# Altium PCB PCB1.PcbDoc
Units mm, origin at the board's own origin, x right, y up, seen from the top; angles counter-clockwise.
Board outline 36.92 x 50 mm, 2 copper layers (Top Layer, Bottom Layer); 21 components, 13 nets, 49 pads, 19 vias.
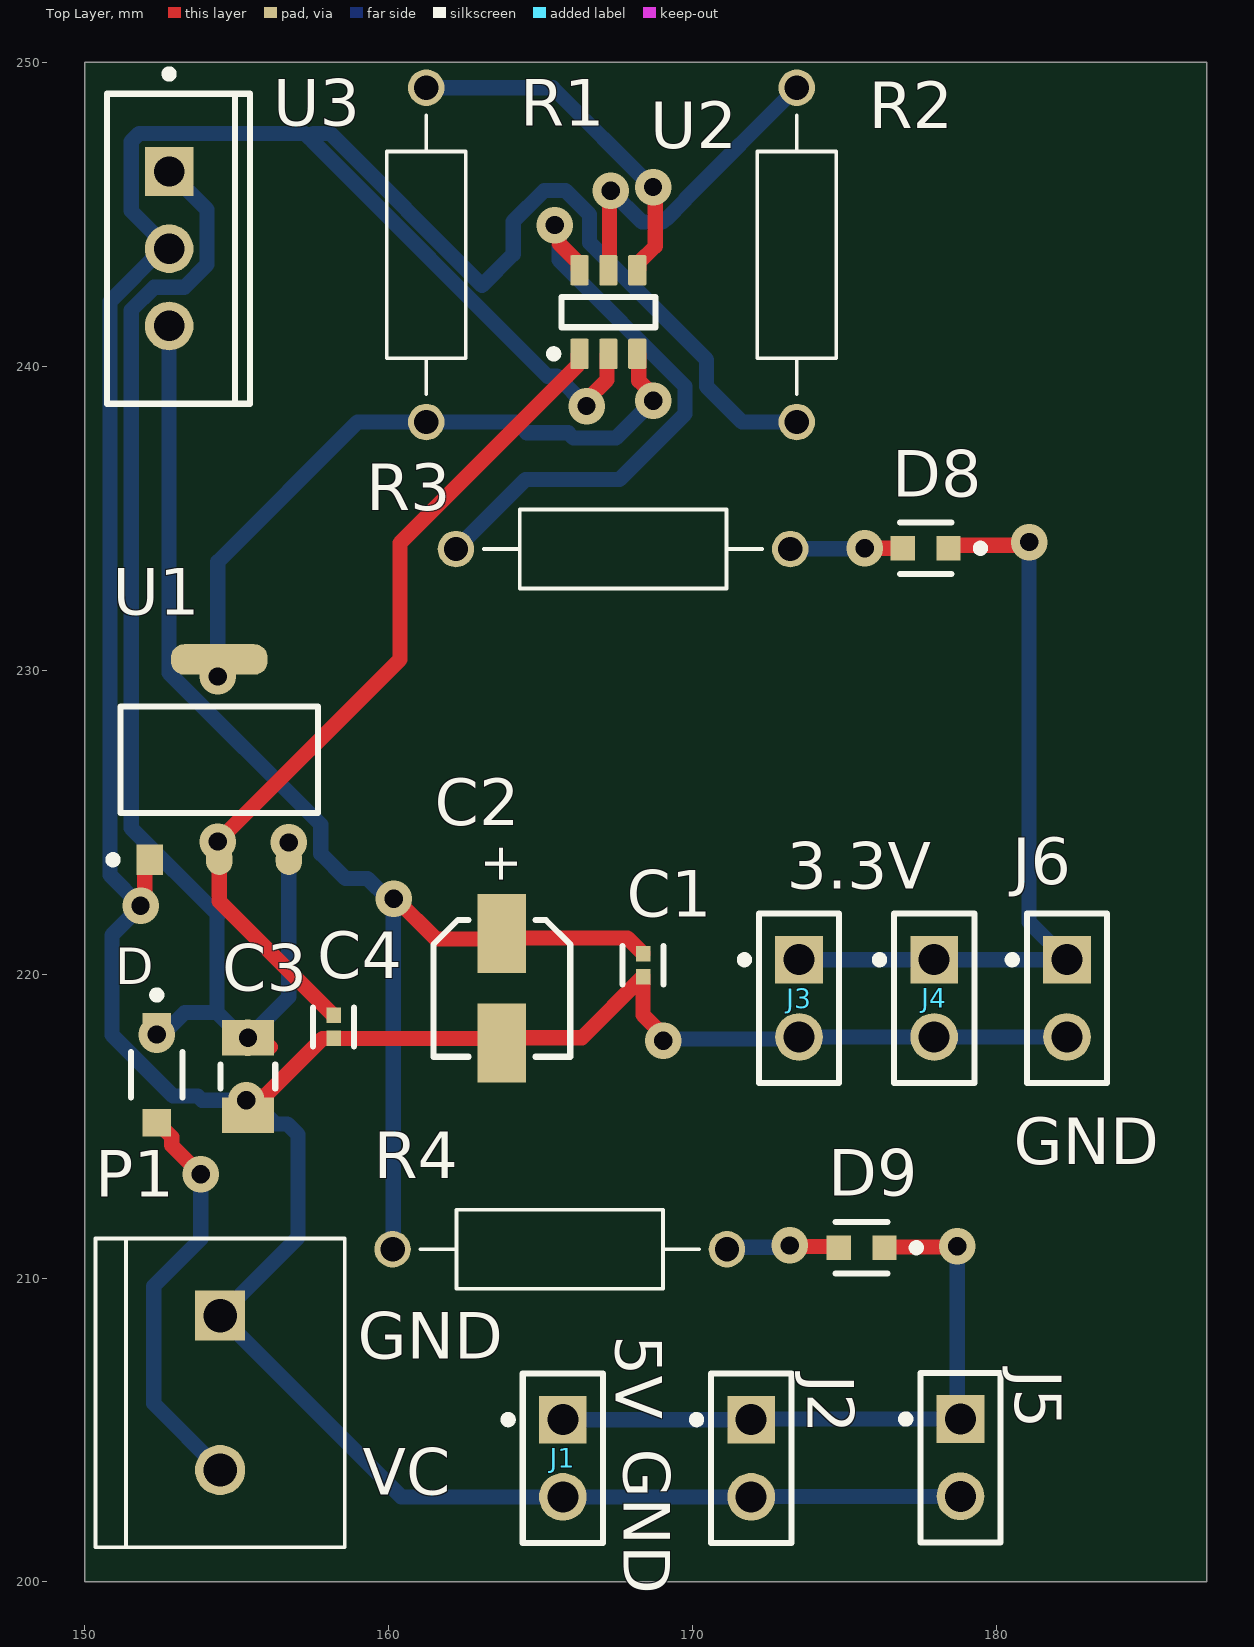
[diagram p0: Top Layer view]
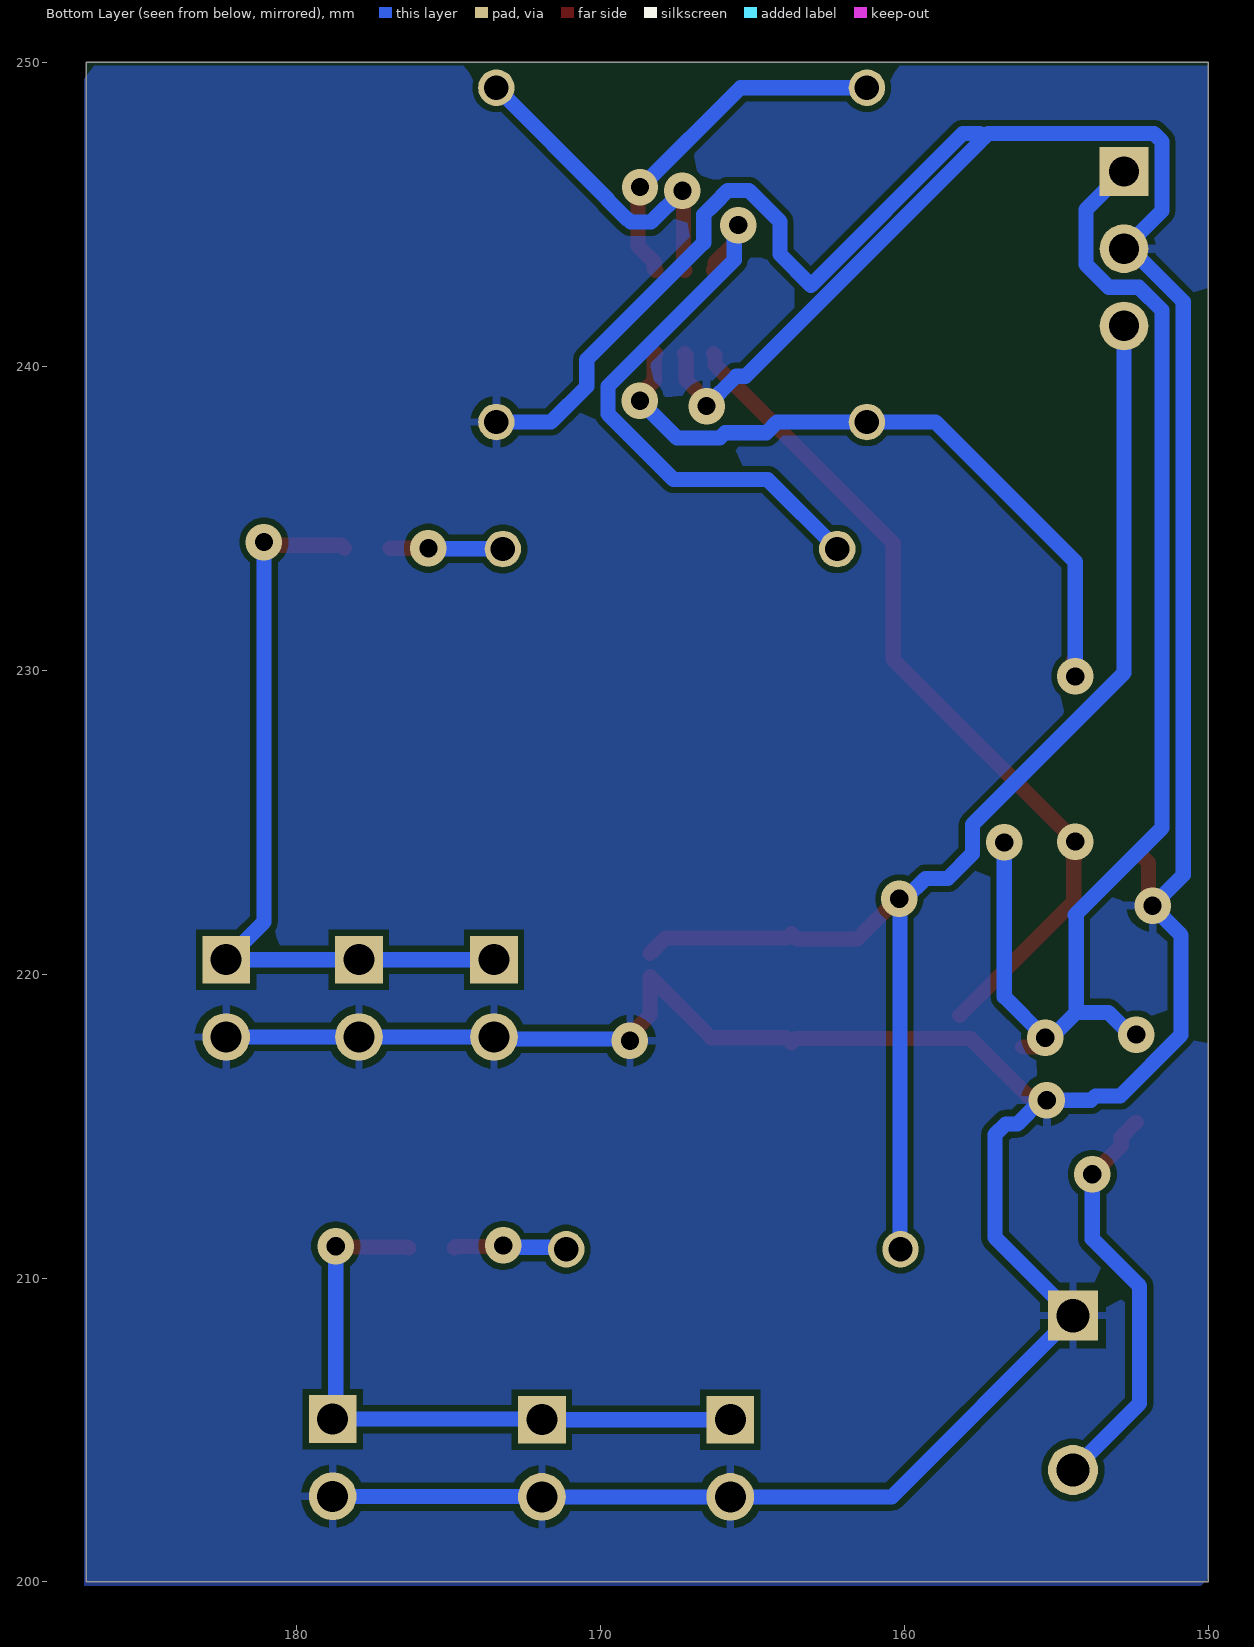
[diagram p1: Bottom Layer view, seen from below]
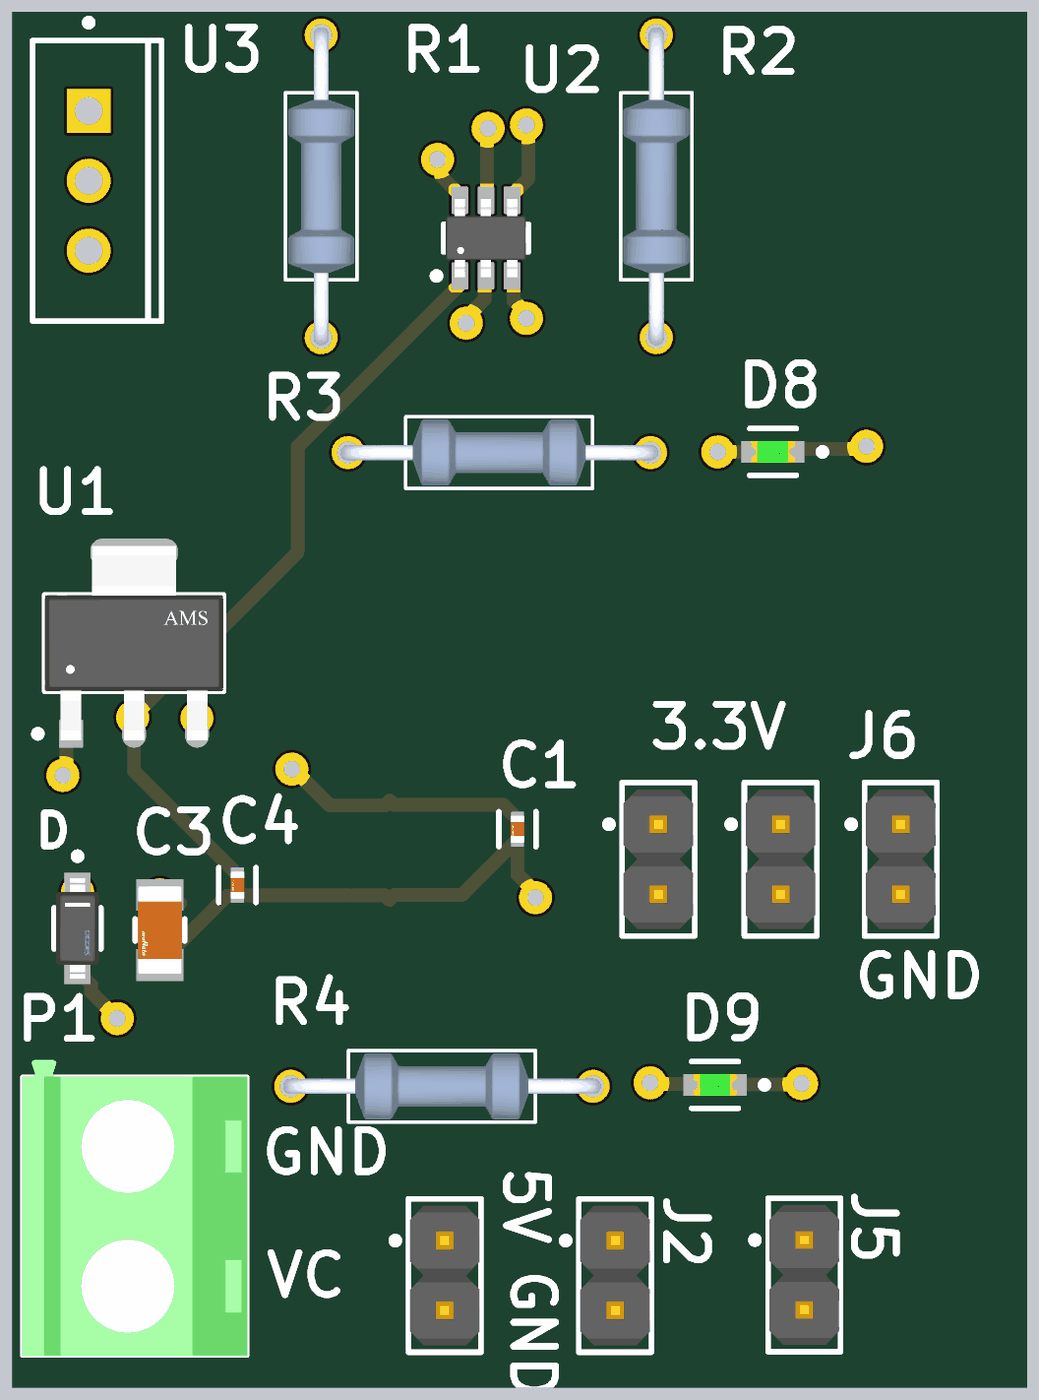
[diagram p2: 3D render of the assembled board from above, using the file's embedded part models]

## Layer stack, top to bottom
Top Solder: solder mask 0.0102, Solder Resist, Dk 3.5
Top Layer: signal copper 0.0356
Dielectric 1: dielectric 0.32, FR-4, Dk 4.8
Bottom Layer: signal copper 0.0356
Bottom Solder: solder mask 0.0102, Solder Resist, Dk 3.5

## Board outline
150,200 150,250 186.924,250 186.924,200

## Design rules (kind name [scope] priority, off if disabled: settings)
Clearance Clearance_1 [All] p1: gap=0.2 ignorepadtopadclearanceinfootprint=FALSE
MinimumSolderMaskSliver [All] p1: minsoldermaskwidth=0.146
PolygonConnect [All] p1: connectstyle=Relief reliefconductorwidth=0.254 reliefentries=4 polygonreliefangle="90 Angle" airgapwidth=0.254
RoutingVias [All] p1: holewidth=0.6 width=1.2 viastyle="Through Hole" minholewidth=0.6 minwidth=1.2 maxholewidth=0.6 maxwidth=1.2
SilkToSolderMaskClearance [All] p1: minsilkscreentomaskgap=0.2 clearancetoexposedcopper=TRUE
SolderMaskExpansion [All] p1: expansion=0.102 istentingtop=FALSE
SupplyNets "Schematic Supply Nets_1" [InNet('+12')] p1: voltage=0.000
SupplyNets "Schematic Supply Nets" [InNet('GND')] p2: voltage=0.000
Width "3.3V width" [All] p1: maxlimit=0.5 minlimit=0.5 preferedwidth=0.5
Width 5V_width [All] p2: maxlimit=0.5 minlimit=0.5 preferedwidth=0.5
Width 12V_width [All] p3: maxlimit=0.5 minlimit=0.5 preferedwidth=0.5
Width [All] p4: maxlimit=0.254 minlimit=0.254 preferedwidth=0.254
28 further rules are at their usual default settings.

## Components (designator, comment, footprint, x,y, rotation, side; value= is the part's Value field where it differs from the comment)
C1 "0.1 uf" FP-CL17-IPC_C 168.377,220.294 r270 top
C2 "22 uf" WCAP-ASLL_D4H5.5 -1106.272,1489.529 r90 top
C3 "0.33 uf" FP-GRM31C-0_2-e0_3_0_8-IPC_C 155.372,216.631 r270 top
C4 "0.1 uf" FP-CL17-IPC_C 158.191,218.262 r270 top
D "B0520LW-7-F" FP-SOD123-MFG 152.375,216.687 r270 top value=170pF (schematic designator D1)
D8 "LTST-C190GKT" FP-LTST-C190GKT-MFG 177.673,234.01 r180 top
D9 "LTST-C190GKT" FP-LTST-C190GKT-MFG 175.565,210.998 r180 top
J1 "M20-9990245" FP-M20-9990245-MFG 165.735,204.069 r270 top
J2 "M20-9990245" FP-M20-9990245-MFG 171.933,204.069 r270 top
J3 "M20-9990245" FP-M20-9990245-MFG 173.507,219.202 r270 top
J4 "M20-9990245" FP-M20-9990245-MFG 177.952,219.202 r270 top
J5 "M20-9990245" FP-M20-9990245-MFG 178.816,204.089 r270 top
J6 "M20-9990245" FP-M20-9990245-MFG 182.321,219.202 r270 top
P1 "282837-2" TE_282837-2 154.457,206.223 r270 top
R1 "MFR-25FBF52-10K" RESAD1100W55L680D260 161.239,243.664 r90 top
R2 "MFR-25FBF52-1.4KOhm" RESAD1100W55L680D260 173.431,243.664 r270 top
R3 "MFR-25FBF52-10K" RESAD1100W55L680D260 167.716,233.985 r0 top
R4 "MFR-25FBF52-10K" RESAD1100W55L680D260 165.633,210.947 r0 top
U1 "AMS1117-3.3" FP-AMS1117-IPC_C 154.432,227.058 r90 top
U2 "TPS2553DBVR-1" DBV0006A_N 167.234,241.783 r90 top
U3 "LM7805CT" FAIR-TO-220-3 152.781,243.865 r0 top

## Footprints (in the part's own frame and the unit in brackets; to place one, negate y for a bottom-side part, rotate by r counter-clockwise, add the part's x,y. Pads: shape width x height; smd on the part's side, far side on the other; paste and mask are expansions set on the pad)
DBV0006A_N [mm] "SOT23, 6-Leads, Body 3.05x1.75mm, Pitch 0.95mm, IPC Medium Density"
  rrect17% 1x0.6 smd: 1(-1.375,0.95) 2(-1.375,0) 3(-1.375,-0.95) 4(1.375,-0.95) 5(1.375,0) 6(1.375,0.95)
  silkscreen extent -1.5,-1.55 0.5,1.92, body extent -1.42,-1.46 1.42,1.46, height 1.11
FAIR-TO-220-3 [mm] "FM, 3-Leads, Body 10.2x4.7mm, Pitch 2.54mm"
  rect 1.6x1.6 hole 1: 1(0,2.54)
  round 1.6 hole 1: 2(0,0) 3(0,-2.54)
  silkscreen extent -2.04,-5.1 2.66,5.87, body extent -2.04,-5.1 2.66,5.1, height 18.95
FP-AMS1117-IPC_C [mm]
  rect 1.004x0.872 smd paste+0 mask+0: 1(-3.295,2.29)
  rrect100% 1.004x0.872 smd paste+0 mask+0: 2(-3.295,0) 3(-3.295,-2.29)
  rrect87% 1.004x3.182 smd paste+0 mask+0: 4(3.295,0)
  silkscreen extent -3.42,-3.25 1.75,3.62, body extent -3.53,-3.25 3.53,3.25, height 1.8
FP-CL17-IPC_C [mm]
  rect 0.515x0.472 smd paste+0 mask+0: 1(-0.379,0) 2(0.379,0)
  silkscreen extent -0.64,-0.67 0.64,0.67, body extent -0.74,-0.38 0.74,0.38, height 0.25
FP-GRM31C-0_2-e0_3_0_8-IPC_C [mm]
  rect 1.155x1.706 smd paste+0 mask+0: 1(-1.276,0) 2(1.276,0)
  silkscreen extent -0.4,-0.9 0.4,0.9, body extent -1.95,-1 1.95,1, height 0.25
FP-LTST-C190GKT-MFG [mm]
  rect 0.8x0.8 smd paste+0 mask+0: 1(-0.75,0) 2(0.75,0)
  silkscreen extent -1.92,-0.85 0.85,0.85, body extent -1.25,-0.55 1.25,0.55, height 0.25
FP-M20-9990245-MFG [mm]
  rect 1.57x1.57 hole 1.02 paste-2539.97 mask+0: 1(-1.27,0)
  round 1.57 hole 1.02 paste-2539.97 mask+0: 2(1.27,0)
  silkscreen extent -2.79,-1.92 2.79,1.32, body extent -2.89,-1.42 2.89,1.42, height 0.25
FP-SOD123-MFG [mm]
  rect 0.9x0.95 smd paste+0 mask+0: 1(-1.575,0) 2(1.575,0)
  silkscreen extent -2.75,-0.85 0.75,0.85, body extent -2.12,-0.95 2.12,0.95, height 0.25
RESAD1100W55L680D260 [mm]
  round 1.2 hole 0.8: 1(-5.5,0) 2(5.5,0)
  silkscreen extent -4.58,-1.3 4.58,1.3, body extent -5.77,-1.2 5.77,1.2, height 2.4
TE_282837-2 [mm]
  rect 1.65x1.65 / inner round 1.65 / far side rect 1.65x1.65 hole 1.1: 1(-2.54,0)
  round 1.65 hole 1.1: 2(2.54,0)
  silkscreen extent -5.08,-4.1 5.08,4.1, body extent -5.68,-4.1 5.08,4.1, height 10
WCAP-ASLL_D4H5.5 [mm] "Aluminium Electrolytic V-Chip SMT Capacitors, 4x5.5mm"
  rect 2.6x1.6 smd: 1(-1268.2,-1270) 2(-1271.8,-1270)
  silkscreen extent -1272.25,-1272.25 -1267.75,-1267.75, body extent -1272.5,-1272.15 -1267.5,-1267.85, height 5.5

## Part data
C1 C4: library part CMP-13271-001069-1, "Cap Ceramic 100nF 10V X7R ±10% SMD 0402 +125°C Paper T/R", Capacitance=100nF, Case Code (Imperial)=0402, Case Code (Metric)=1005, Dielectric=X7R, Max Operating Temperature=125°C, Min Operating Temperature=-55°C, Package Quantity=1, Tolerance=10%, Voltage Rating=10V, Case/Package=0402, Contact Plating=Tin, Depth=0.5mm, Height=0.5mm, Length=1mm, Mount="Surface Mount", Packaging="Tape and Reel", Radiation Hardening=No, Thickness=0.022inch, Width=0.02inch
C2: library part CMP-03913-53914501-2, "865060240001 WCAP-ASLL Aluminum Electrolytic Capacitors", Capacitance=22µF, Case/Package=Radial, ESR (Equivalent Series Resistance)=1.70696Ω, Insulation Resistance=3.33333MΩ, Leakage Current=3µA, Max Operating Temperature=105°C, Min Operating Temperature=-55°C, Ripple Current=90mA, Tolerance=20%, Voltage Rating=10V, Diameter=4mm, Height=5.5mm, Height - Seated (Max)=5.5118mm, Impedance=1.35Ω, Length=5.5mm, Life (Hours)=2000hours, Mount="Surface Mount", NexarPartId=53914501, Polarity=Polar, REACH SVHC=Unknown, Ripple Current (AC)=90mA, RoHS=Compliant, Voltage Rating (DC)=10V
C3: library part CMP-06035-063427-1, "CAP CER 0.33UF 25V C0G/NP0 1206", RoHS Compliant=Yes
D: library part CMP-12790-000026-1, "DIODE SCHOTTKY 20V 500MA SOD123", Capacitance=170pF, Forward Current=0.5A, Manufacturer="Diodes Inc.", Max Junction Temp=+125°C, Max Repetitive Reverse Voltage=20V, Max Surge Forward Current=5.5A, Package=SOD123, Peak Reverse Current=250uA, Temperature="-65°C to +125°C", Temperature Range Low=-65°C, Automotive=No, Category=Diode, ComponentLink2Description=Datasheet, ComponentLink2URL=https://www.diodes.com/assets/Datasheets/ds30051.pdf, Device Class L1="Discrete Semiconductors", Device Class L2=Diodes, Device Class L3="Schottky Diodes", Digikey Description="DIODE SCHOTTKY 20V 500MA SOD123", Footprint Url=https://www.diodes.com/assets/Package-Files/SOD123.pdf, Height=1.45mm, Ipc Land Pattern Name=SOD365155X123-2, Lead Free=Yes, Manufacturer Part Number=B0520LW-7-F, Mouser Description="Schottky Diodes & Rectifiers 20V 410mW", Octopart=https://octopart.com/b0520lw-7-f-diodes+inc.-325707, Reverse Voltage=20V, RoHS=TRUE, Standoff Height=0mm, Temperature Range High=+125°C
D8 D9: library part CMP-22017-000005-2, "LED GREEN CLEAR CHIP SMD", Case Code (Imperial)=0603, Case Code (Metric)=1608, Color=Green, Forward Current=30mA, Forward Voltage=2.1V, Lens Color=Colorless, Max Operating Temperature=85°C, Min Operating Temperature=-55°C, Package Quantity=1, Power Dissipation=100mW, Reverse Voltage=5V, Test Current=10mA, Voltage=2V, Case/Package=0603, Depth=0.8mm, Dominant Wavelength=569nm, Height=0.8mm, Illumination Color=Green, Lead Free="Lead Free", Length=1.6mm, Lens Style=Clear, Lens Transparency=Clear, Luminous Intensity=6mcd, Mount="Surface Mount", Number of Elements=1, Number of LEDs=1, Number of Pins=2, Packaging="Tape and Reel", Power Rating=100mW, Radiation Hardening=No, Viewing Angle=130°, Wavelength=565nm, Width=0.8mm
J1 J2 J3 J4 J5 J6: library part CMP-15831-000105-1, "CONN HEADER VERT 2POS 2.54MM", Case/Package=SIL, Color=Black, Contact Resistance=25mR, Current=3A, Flammability Rating="UL94 V-0", Insulation Resistance=10GR, Max Operating Temperature=105°C, Min Operating Temperature=-40°C, Package Quantity=1000, Voltage=50V, Voltage Rating (AC)=750V, Connector Type="Male Pin", Contact Finish - Mating=GOLD, Contact Material=Brass, Contact Mating Length=0.24inch, Contact Plating=Gold, Contact Shape=Square, Contact Type="Male Pin", Current Rating=3A, Depth=2.54mm, Fastening Type=Pull, Gender=Male, Height=0.12inch, Housing Color=Black, Housing Material=Nylon, Insulation Color=Black, Insulation Material=Nylon, Lead Pitch=2.54mm, Length=5.08mm, Mated Stacking Heights=16.54mm, Mating Cycles=300, Max Current Rating=3A, Mount="Through Hole", Number of Contacts=2, Number of Poles=2, Number of Positions=2, Number of Rows=1, Orientation=Straight, Packaging=Bulk, Pitch=2.54mm, Radiation Hardening=No, Reach SVHC Compliant=Yes, Series=M20, Termination=Solder, Weight=0.25lb, Width=0.25inch, Working Voltage=750V
P1: "Ð Ð°Ð·ÑŠÐµÐ¼Ð½Ñ‹Ðµ ÐºÐ»ÐµÐ¼Ð¼Ð½Ñ‹Ðµ ÐºÐ¾Ð»Ð¾Ð´ÐºÐ¸ Ð Ð¾Ð·ÐµÑ‚ÐºÐ° 2 Ð¿Ð¾Ð»Ð¾Ð¶ÐµÐ½Ð¸Ñ 5,08 Ð¼Ð¼ ÐŸÑ€Ð¸Ð¿Ð¾Ð¹ Ð¿Ñ€ÑÐ¼Ð¾Ð¹ Ñ‡ÐµÑ€ÐµÐ· Ð¾Ñ‚Ð²ÐµÑ€ÑÑ‚Ð¸Ðµ 13,5 Ð / ÐºÐ¾Ð½Ñ‚Ð°ÐºÑ‚", Package=None, Availability="In Stock", Check_prices=https://www.snapeda.com/parts/282837-2/TE+Connectivity+AMP+Connectors/view-part/?ref=eda, MF="TE Connectivity", MP=282837-2, Price=None, Purchase-URL=https://pricing.snapeda.com/search/part/282837-2/?ref=eda, SnapEDA_Link=https://www.snapeda.com/parts/282837-2/TE+Connectivity+AMP+Connectors/view-part/?ref=snap
R1 R3 R4: "10.2 kOhms Â±1% 0.25W, 1/4W Through Hole Resistor Axial - Metal Film", Package="RADIAL-2 YAGEO", Check_prices=https://www.snapeda.com/parts/MFR-25FBF52-10K/Yageo/view-part/?ref=eda, MF=Yageo, MP=MFR-25FBF52-10K, SnapEDA_Link=https://www.snapeda.com/parts/MFR-25FBF52-10K/Yageo/view-part/?ref=snap
R2: library part MFR-25FBF52-10K, "10.2 kOhms Â±1% 0.25W, 1/4W Through Hole Resistor Axial - Metal Film", Package="RADIAL-2 YAGEO", Check_prices=https://www.snapeda.com/parts/MFR-25FBF52-10K/Yageo/view-part/?ref=eda, MF=Yageo, MP=MFR-25FBF52-10K, SnapEDA_Link=https://www.snapeda.com/parts/MFR-25FBF52-10K/Yageo/view-part/?ref=snap
U1: library part CMP-209535-000001-1, "LDO Voltage Regulators 1A, 3.3V", Dropout Voltage=1.1V, Manufacturer="Advanced Monolithic Systems", Max Junction Temp=+125°C, Max Power Dissipation=1.2W, Max Supply Voltage=15V, Nominal Supply Current=5mA, Output Current=1A, Output Voltage=3.3V, Package=AMS1117, Temperature="-40°C to +125°C", Temperature Range Low=-40°C, Automotive=No, Category=IC, ComponentLink2Description=Datasheet, ComponentLink2URL=http://www.advanced-monolithic.com/pdf/ds1117.pdf, Device Class L1="Integrated Circuits (ICs)", Device Class L2="Power Management ICs", Device Class L3="Voltage Regulators - Linear", Height=1.8mm, Ipc Land Pattern Name=SOT229P700X180-4, Lead Free=Yes, Manufacturer Part Number=AMS1117-3.3, Number Of Outputs=1, Octopart=https://octopart.com/ams1117-3.3-advanced+monolithic+systems-25899300, Output Type=Fixed, RoHS=TRUE, Standoff Height=0.64mm, Temperature Range High=+125°C
U2: library part CMP-0337-00282-2, "Adjustable, Active High, Latch-off, Current-Limited Power-Distribution Switch, 0.075 to 1.7 A Current Limit, -40 to 85 degC, 6-pin SOT-23 (DBV), Green (RoHS & no Sb/Br)", Continuous Current(Max)(A)=1.5, Current Limit Accuracy @ 1A="+/-7.5% (925mA min / 1075mA max)", Current Limit Topology=Latch-off, Current Limit(A)="0.075 to 1.7", Manufacturer="Texas Instruments", Rating=Catalog, Code_JEDEC=MO-178-AB*, ComponentLink1Description=Datasheet, ComponentLink1URL=http://www.ti.com/general/docs/lit/getliterature.tsp?genericPartNumber=TPS2553-1&fileType=pdf, DatasheetVersion=SLVS841E, Eco-Plan="Green (RoHS & no Sb/Br)", Enable="Active High", Mounting Technology="Surface Mount", Number of Switches=1, PackageDescription="6-Pin Plastic Small-Outline Package, 2.9 x 1.6 mm Body, 0.95 mm Pitch, 2.8 mm Lead Span", PackageReference=DBV0006A, PackageVersion="revK, Mar-2006", PartNumber=TPS2553DBVR-1, rDS(on) per FET(Typ)(mOhms)="100/DRV, 85/DBV", Vin(Max)(V)=6.5, Vin(Min)(V)=2.5
U3: library part CMP-2000-04938-1, "Positive Voltage Regulator, 5 V, 1 A, -40 to 125 degC, 3-Pin TO-220, RoHS, Tube", Manufacturer=FairchildSemiconductor, Maximum Input Voltage=35V, Maximum Output Current=2.2(Typ)A, Maximum Quiescent Current=8mA, Operating Temperature=-40to125degC, Output Voltage=5V, Package=3TO-220AB, Package Description="3-Pin Through Hole Device, Body 10 x 4.5 mm, Pitch 2.54 mm", Package Reference=TO-220, Typical Dropout Voltage @ Current=2@1AV, Accuracy=±4%, Category=LinearRegulator, Datasheet URL=https://datasheet.ciiva.com/26904/lm7805ct-26904988.pdf, Datasheet Version=Aug-12, Line Regulation=100mV, Load Regulation=100mV, Manufacturer URL=https://www.fairchildsemi.com/, Mounting=ThroughHole, Number Of Outputs=1, Output Type=Fixed, Package URL=https://www.fairchildsemi.com/package-drawings/TO/TO220B03.pdf, Packaging=Rail/Tube, Polarity=Positive, Rad Hard=No, Type=Linear

## Via types
v1: diameter 1.2, hole 0.6, Top Layer to Bottom Layer, 19 vias

## Nets (pads, with @x,y where several pads share a name; then routed paths per layer and width w, separated by ;. In a path a pad name is that pad's centre, name@x,y a point inside that pad or via, vN(x,y) a via of type N, cw(c..) or ccw(c..) an arc to the next point about the centre after c; other vN are vias at no path point)
3.3V: D8.1 J3.1 J4.1 J6.1 | length 25.8
  Top Layer w0.5: D8.1 178.525,234.112 180.975,234.112 v1(181.077,234.213)
  Bottom Layer w0.5: J3.1 J4.1 J6.1 181.077,221.717 v1(181.077,234.213)
5V: D9.1 J1.1 J2.1 J5.1 | length 21.2
  Top Layer w0.5: D9.1 176.34,211.023 178.689,211.023 v1(178.714,211.049)
  Bottom Layer w0.5: J1.1 J2.1 171.953,205.359 J5.1 178.714,205.461 v1(178.714,211.049)
+12: D.2 P1.2 | length 13.6
  Top Layer w0.5: D.2 152.4,215.112 152.868,214.644 152.868,214.365 v1(153.822,213.411)
  Bottom Layer w0.5: v1(153.822,213.411) 153.822,211.281 152.273,209.732 152.273,205.867 P1.2
GND: C1.2 C2.2 C3.2 C4.2 J1.2 J2.2 J3.2 J4.2 J5.2 J6.2 P1.1 R2.2 U1.1 U2.2 U3.2 | length 150.2
  Top Layer w0.5: v1(151.841,222.25) 151.975,222.384 151.975,223.662 U1.1@152.265,223.952 ; v1(155.321,215.849) 155.455,215.983 155.932,215.983 157.824,217.876 158.184,217.876 C4.2 163.574,217.884 C2.2 163.906,217.907 166.361,217.907 168.371,219.916 C1.2 168.377,218.655 169.037,217.994 v1(169.037,217.805) ; v1(166.516,238.691) 166.516,238.88 167.184,239.548 167.184,240.358 U2.2
  Bottom Layer w0.5: 157.386,247.516 157.246,247.655 151.795,247.655 151.531,247.392 151.531,245.115 U3.2 152.563,243.865 150.831,242.133 150.831,223.26 v1(151.841,222.25) 151.841,222.22 150.901,221.281 150.901,217.996 152.905,215.993 153.721,215.993 153.865,215.849 v1(155.321,215.849) 155.51,215.849 156.288,215.072 156.669,215.072 157.023,214.718 157.023,211.328 P1.1 160.421,202.799 J1.2 J2.2 171.943,202.809 178.806,202.809 J5.2 ; 157.525,247.376 165.232,239.67 165.537,239.67 v1(166.516,238.691) ; 157.525,247.655 158.084,247.655 163.079,242.661 164.101,243.682 164.101,244.757 165.122,245.779 165.819,245.779 166.26,245.339 166.26,245.335 166.607,244.988 166.607,244.065 170.457,240.216 170.457,239.338 171.631,238.164 R2.2 ; v1(169.037,217.805) 169.1,217.868 173.444,217.868 J3.2 J4.2 J6.2
NetC1_1: C1.1 C2.1 R4.1 U3.3 | length 43.1
  Top Layer w0.5: v1(160.172,222.479) 160.235,222.479 161.556,221.158 163.557,221.158 C2.1 163.874,221.183 167.866,221.183 C1.1
  Bottom Layer w0.5: U3.3 152.781,229.909 157.768,224.922 157.768,223.962 158.58,223.149 159.312,223.149 159.983,222.479 v1(160.172,222.479) 160.153,222.459 160.153,210.966 R4.1
NetC3_1: C3.1 D.1 U1.3 U3.1 | length 43.3
  Top Layer w0.5: v1(152.375,218.008) D.1 ; v1(155.372,217.907) 155.677,217.602 C3.1@156.108,217.602 ; v1(156.718,224.333) 156.72,224.331 156.72,223.765 U1.3
  Bottom Layer w0.5: v1(152.375,218.008) 152.564,218.008 153.294,218.738 154.351,218.738 ; U3.1 154.031,245.155 154.031,243.348 153.279,242.595 152.283,242.595 151.531,241.843 151.531,224.809 154.395,221.945 154.351,221.901 154.351,218.738 ; v1(156.718,224.333) 156.718,219.253 v1(155.372,217.907) 155.182,217.907 154.351,218.738
NetC4_1: C4.1 U1.2 U2.1 | length 28.2
  Top Layer w0.5: U1.2@154.407,223.788 154.407,224.333 v1(154.381,224.358) 160.374,230.351 160.374,234.187 166.234,240.046 166.234,240.358 U2.1 ; U1.2 154.432,222.394 158.185,218.641 C4.1
NetD8_2: D8.2 R3.2 | length 3.7
  Top Layer w0.5: v1(175.666,234.01) D8.2
  Bottom Layer w0.5: R3.2 173.229,233.998 175.654,233.998 v1(175.666,234.01)
NetD9_2: D9.2 R4.2 | length 3.8
  Top Layer w0.5: v1(173.203,211.074) 173.241,211.036 174.777,211.036 D9.2
  Bottom Layer w0.5: R4.2 171.197,211.01 173.139,211.01 v1(173.203,211.074)
NetR1_1: R1.1 U1.4 U2.3 | length 23.1
  Top Layer w0.5: v1(154.381,229.794) 154.432,229.845 U1.4 ; U2.3 168.234,240.358 168.234,239.524 168.707,239.051 v1(168.707,238.862)
  Bottom Layer w0.5: v1(154.381,229.794) 154.381,233.565 158.98,238.164 R1.1 164.195,238.164 164.547,237.812 165.91,237.812 166.081,237.641 167.486,237.641 v1(168.707,238.862)
NetR1_2: R1.2 U2.4 | length 11.8
  Top Layer w0.5: U2.4 168.234,243.208 168.234,243.408 168.775,243.949 168.775,245.824 v1(168.704,245.894)
  Bottom Layer w0.5: R1.2 164.678,249.164 165.401,249.164 168.671,245.894 v1(168.704,245.894)
NetR2_1: R2.1 U2.5 | length 11
  Top Layer w0.5: U2.5 167.272,243.196 167.272,245.732 v1(167.31,245.77)
  Bottom Layer w0.5: v1(167.31,245.77) 168.34,244.741 169.008,244.741 169.111,244.844 169.139,244.844 169.754,245.459 169.754,245.487 R2.1
NetR3_1: R3.1 U2.6 | length 19.2
  Top Layer w0.5: v1(165.471,244.643) 165.605,244.509 165.605,244.036 166.234,243.408 166.234,243.208 U2.6
  Bottom Layer w0.5: R3.1 164.504,236.273 167.603,236.273 169.757,238.427 169.757,239.34 165.605,243.492 165.605,244.509 v1(165.471,244.643)

## Polygon pours and split planes (outlines as drawn)
GND on Bottom Layer "GND_L02_P000" (solid, remove dead copper, pour order 0): 186.658,249.892 149.989,249.892 149.989,200.14 150.253,199.876 186.989,199.876 186.989,249.892 187.121,250.024

## Silkscreen, mask and mechanical layers (free items; w line width, h text height)
Top Overlay:
  text "3.3V" at 173.099,222.815 h1.52
  text "GND" at 180.565,213.748 h1.52
  text "5V" at 167.48,208.11 h1.52 r270
  text "GND" at 158.986,207.348 h1.52
  text "GND" at 167.743,204.375 h1.52 r270
  text "VC" at 159.15,202.877 h1.52

## Text inside footprints (layer, text, board x,y; h text height)
C2: Top Overlay "+" at 164.228,222.929 h1.22 r90